# EAGLE board PWM 555 - Cópia (EAGLE 6.3)
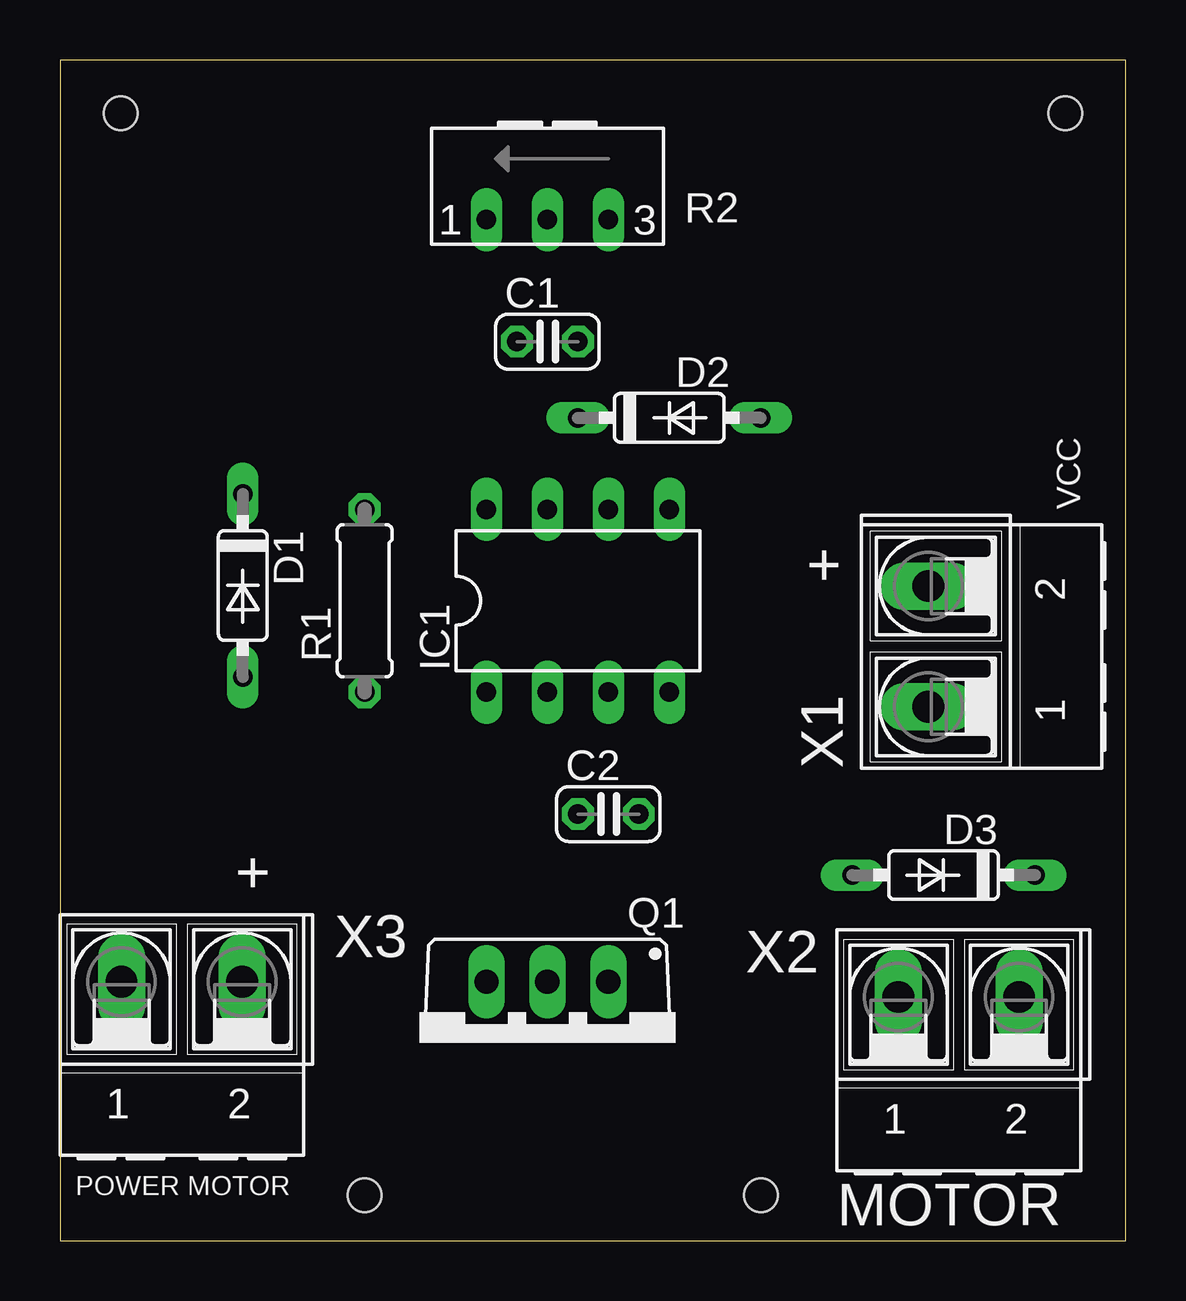
[diagram p0: board, top side]
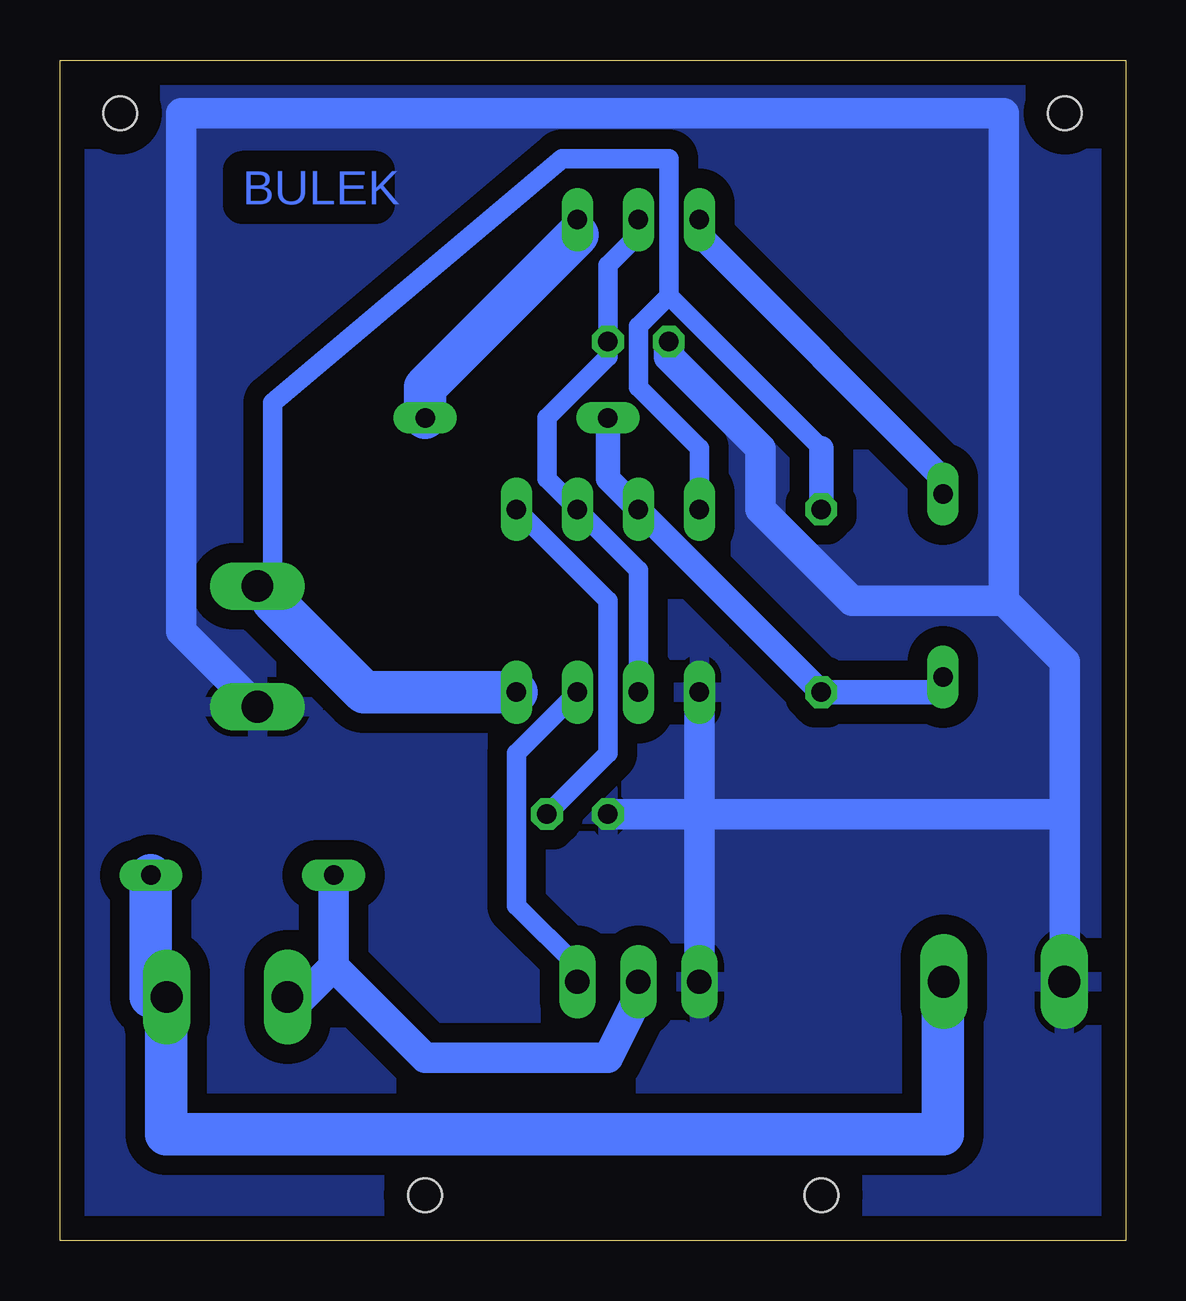
[diagram p1: board, bottom side, seen from below]

Size 44.43 x 49.2 mm. Coordinates in mm from the lower left corner, seen from the top.
Outline: 0,0 44.43,0 44.43,49.2 0,49.2 0,0
Copper layers (1*16): Top 0.035mm / dielectric 1.5mm / Bottom 0.035mm
Design rules "default": minimum track width 10mil, minimum drill 24mil, track to track 8mil, track to pad 8mil, pad to pad 8mil, via to via 8mil, smd to smd 8mil, copper to edge 40mil, drill to drill 8mil, minimum pad ring 10mil, minimum via ring 8mil, stop-mask expansion 4mil, vias tented up to drill 0mil, thermal gap 10mil
Net classes: 0 default: width 0.813 mm; 1 Power: width 1.27 mm
Holes 1.4 mm at 2.54,46.99 12.7,1.91 41.91,46.99 29.21,1.91

## Footprints (pad centres in the part's own frame; a part is rotated, then mirrored left to right if it is on the bottom)
C025-024X044 = drill 0.813 octagon: 1 -1.27,0; 2 1.27,0
DO35-7 = drill 0.813 long: A 3.81,0; C -3.81,0
DIL-08 = drill 0.813 long: 1 -3.81,-3.81; 2 -1.27,-3.81; 3 1.27,-3.81; 4 3.81,-3.81; 5 3.81,3.81; 6 1.27,3.81; 7 -1.27,3.81; 8 -3.81,3.81
TO220BV = drill 1.016 long: D 0,-2.54; G -2.54,-2.54; S 2.54,-2.54
0207/7 = drill 0.813 octagon: 1 -3.81,0; 2 3.81,0
S63S = drill 0.813 long: A 2.54,1.27; E -2.54,1.27; S 0,1.27
AK500/2-H = drill 1.321 long: 1 -2.515,0; 2 2.515,0

## Placement (x,y rotation side)
C1  0.1uF  [C025-024X044]  20.32,37.47 0 top
C2  0.01uF  [C025-024X044]  22.86,17.78 0 top
D1  1N4148DO35-7  [DO35-7]  7.62,27.3 270 top
D2  1N4148DO35-7  [DO35-7]  25.4,34.29 0 top
D3  1N4148DO35-7  [DO35-7]  36.83,15.24 180 top
IC1  NE555  [DIL-08]  21.59,26.67 0 top
Q1  IRF530  [TO220BV]  20.32,8.26 180 top
R1  1K  [0207/7]  12.7,26.67 90 top
R2  100K  [S63S]  20.32,43.81 180 top
X1  VCC  [AK500/2-H]  36.2,24.77 90 top
X2  MOTOR  [AK500/2-H]  37.47,10.16 0 top
X3  POWER MOTOR  [AK500/2-H]  5.08,10.79 0 top

## Library data of the parts
C1 C2 R1 = rcl
D1-D3 = diode
IC1 = st-microelectronics; MF: Arrow Electronics; MPN: NE555N; OC_FARNELL: 1467742; OC_NEWARK: 89K1486
Q1 = transistor-power
R2 = pot
X1-X3 = con-ptr500; OC_FARNELL: unknown; OC_NEWARK: unknown

## Nets
GND [Power]: C1.1 C2.1 IC1.1 Q1.S X1.1 X3.1
N$1: D1.A D2.C IC1.7 R1.1
N$2: C1.2 IC1.2 IC1.6 R2.S
N$4: D1.C R2.A
N$5: D2.A R2.E
N$7: IC1.3 Q1.G
N$8: C2.2 IC1.5
N$9 [Power]: D3.A Q1.D X2.1
V+ [Power]: D3.C X2.2 X3.2
VCC: IC1.4 IC1.8 R1.2 X1.2

## Tracks (layer width: path | path; a pad name or v marks a point on that pad's centre or on a via)
GND
  Bottom 1.27: Q1.S 17.78,17.78 | 17.78,17.78 IC1.1 | 17.78,17.78 C2.1 | 5.08,26.67 11.43,26.67 15.24,30.48 15.24,33.02 19.05,36.83 C1.1 | 5.08,26.67 2.54,24.13 2.54,17.78 | 2.54,17.78 2.54,11.43 X3.1 | 5.08,26.67 5.08,46.99 39.37,46.99 39.37,25.4 36.83,22.86 X1.1 | 2.54,17.78 17.78,17.78
  pour Bottom (isolate 0.813): 0,0 0,49.53 44.45,49.53 44.45,0
N$1
  Bottom 1.016: D1.A 7.62,22.86 R1.1 IC1.7 21.59,31.75 D2.C
N$2
  Bottom 0.813: R2.S 20.32,41.91 21.59,40.64 C1.2 21.59,36.83 24.13,34.29 24.13,31.75 IC1.6 20.32,27.94 IC1.2
N$4
  Bottom 0.813: 7.62,31.75 D1.C | 17.78,41.91 R2.A
  Bottom 1.016: 17.78,41.91 7.62,31.75
N$5
  Bottom 0.813: 22.86,41.91 R2.E
  Bottom 1.778: 22.86,41.91 29.21,35.56 D2.A
N$7
  Bottom 0.813: IC1.3 25.4,20.32 25.4,13.97 22.86,11.43 Q1.G
N$8
  Bottom 0.813: C2.2 21.59,20.32 21.59,26.67 IC1.5
N$9
  Bottom 1.27: 33.02,11.43 D3.A | 33.02,11.43 34.29,10.16 X2.1 | 33.02,11.43 29.21,7.62 21.59,7.62 20.32,10.16 Q1.D
V+
  Bottom 1.27: 40.64,10.16 40.01,10.16 X2.2 | 7.62,10.16 X3.2
  Bottom 1.778: 40.64,10.16 D3.C | 7.62,10.16 7.62,4.45 40.01,4.45 40.01,10.16
VCC
  Bottom 0.813: 19.05,39.37 12.7,33.02 | 19.05,39.37 20.32,38.1 20.32,35.56 17.78,33.02 IC1.8 | 35.56,26.67 X1.2 35.56,27.94 35.56,34.92 23.5,45.09 19.05,45.09 19.05,39.37
  Bottom 1.016: 12.7,33.02 R1.2
  Bottom 1.778: IC1.4 31.75,22.86 35.56,26.67

## Text on the board
Bottom: BULEK
tNames: + | +